# EAGLE board ext_power_M (EAGLE 9.6.2)
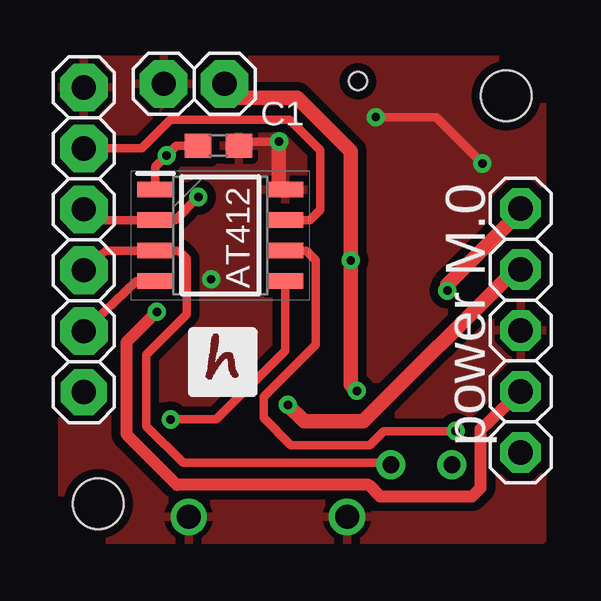
[diagram p0: board, top side]
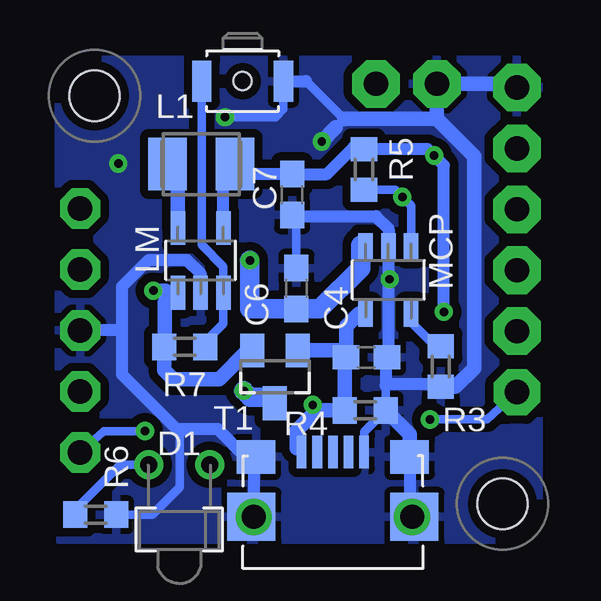
[diagram p1: board, bottom side, seen from below]

No outline drawn. Coordinates in mm, seen from the top.
Copper layers (1*16): Top 0.035mm / dielectric 1.5mm / Bottom 0.035mm
Design rules "default *": minimum track width 14mil, minimum drill 0.35mm, track to track 14mil, track to pad 6mil, pad to pad 6mil, via to via 14mil, smd to smd 14mil, copper to edge 15mil, drill to drill 15mil, minimum pad ring 10mil, minimum via ring 8mil, stop-mask expansion 4mil, vias tented up to drill 0mil, thermal gap 10mil
Holes 2.1 mm at 2,2 19,19

## Footprints (pad centres in the part's own frame; a part is rotated, then mirrored left to right if it is on the bottom)
SOIC127P600X175-8N = smd 1.5 x 0.65: 1 -2.7,1.905; 2 -2.7,0.635; 3 -2.7,-0.635; 4 -2.7,-1.905; 5 2.7,-1.905; 6 2.7,-0.635; 7 2.7,0.635; 8 2.7,1.905
C0603 = smd 1.1 x 1: 1 -0.85,0; 2 0.85,0
LED1.8 = drill 0.7: A -1.27,-0.4; K 1.27,-0.4
1X06 = drill 1.016 pad 1.93 octagon: 1 -6.35,0 | drill 1.016 pad 1.981 octagon: 2 -3.81,0; 3 -1.27,0; 4 1.27,0; 5 3.81,0; 6 6.35,0
1X05 = drill 1.016 pad 1.676 octagon: 1 -5.08,0; 2 -2.54,0; 3 0,0; 4 2.54,0; 5 5.08,0
L3230M = smd 1.6 x 2.2: 1 -1.4,0; 2 1.4,0
1X02 = drill 1.016 pad 1.981 octagon: 1 -1.27,0; 2 1.27,0
SOT32-5 = smd 0.6 x 1.4: BP 0.95,1.35; GND 0,-1.35; SHDN 0.95,-1.35; VIN -0.95,-1.35; VOUT -0.95,1.35
SOT23-5 = smd 0.6 x 1.1: 1 -0.95,-1.45; 2 0,-1.45; 3 0.95,-1.45; 4 0.95,1.35; 5 -0.95,1.35
R0603 = smd 1 x 1.1: 1 -0.85,0; 2 0.85,0
BUTTON-B3U = smd 0.8 x 1.7: P$1 -1.7,0; P$2 1.7,0 | hole 0.75: 0,0
SOT23 = smd 1 x 1.4: D 0,1.1; G -0.95,-1.1; S 0.95,-1.1
MICRO-USB = smd 0.4 x 1.35: D+ 0,2.5; D- -0.65,2.5; GND 1.3,2.5; NC 0.65,2.5; VUSB -1.3,2.5 | smd 2 x 2: GND1 -3.4,-0.2; GND2 3.4,-0.2 | smd 1.6 x 1.4: GND3 -3.202,2.3; GND4 3.2,2.3 | drill 1: P$1 -3.3,-0.2; P$2 3.3,-0.2

## Placement (x,y rotation side)
AT412  AT412  [SOIC127P600X175-8N]  7.09,13.18 0 top
C1  100n  [C0603]  7.01,16.92 0 top
C4  4u7  [C0603]  7.67,8.1 180 bottom
C6  4u7  [C0603]  10.59,10.97 270 bottom
C7  10u  [C0603]  10.77,14.88 90 bottom
D1  LED1.8  [LED1.8]  15.47,3.23 180 bottom
JP2  [1X06]  1.4,13 90 top
JP3  [1X05]  19.6,9.22 270 top
L1  2u2  [L3230M]  14.55,16.15 0 bottom
LIPOL  [1X02]  6,19.5 0 top
LM  TC  [SOT32-5]  14.58,12.14 0 bottom
MCP  MCP  [SOT23-5]  6.76,11.28 180 bottom
R3  22k  [R0603]  4.57,7.72 90 bottom
R4  100k  [R0603]  7.72,5.89 180 bottom
R5  100k  [R0603]  7.77,15.93 270 bottom
R6  2k2  [R0603]  18.95,1.55 180 bottom
R7  100k  [R0603]  15.24,8.53 0 bottom
RESET  BYTTON-B3U  [BUTTON-B3U]  12.83,19.61 0 bottom
T1  FDV  [SOT23]  11.48,7.29 180 bottom
USB  MICRO-USB  [MICRO-USB]  9.07,1.65 0 bottom

## Library data of the parts
AT412 = ATTINY412-SSN; DESCRIPTION: 8-bit Microcontrollers - MCU 20MHz, 4KB, SOIC8, Ind 105C, Green, Tube; HEIGHT: 1.75mm; MANUFACTURER_NAME: Microchip; MANUFACTURER_PART_NUMBER: ATTINY412-SSN; MOUSER_PART_NUMBER: 579-ATTINY412-SSN; MOUSER_PRICE-STOCK: https://www.mouser.co.uk/ProductDetail/Microchip-Technology/ATTINY412-SSN?qs=3HJ2avRr9PItQG9ZsCamPQ%3D%3D
C1 C4 C6 C7 = rcl; SPICEPREFIX: C
D1 LM MCP RESET T1 = !stavebnice03
JP2 JP3 LIPOL = pinhead2
L1 = rcl; SPICEPREFIX: L
R3-R7 = rcl; SPICEPREFIX: R
USB = hugo

## Nets
GND: AT412.8 C1.2 C4.1 C6.1 C7.1 JP2.6 JP3.3 LIPOL.1 LM.GND MCP.2 R3.1 R4.1 R6.1 RESET.P$2 USB.GND USB.GND1 USB.GND2 USB.GND3 USB.GND4 USB.P$1 USB.P$2
N$2: L1.1 LM.VOUT
N$8: C6.2 LIPOL.2 MCP.3 T1.D
N$9: C4.2 JP3.2 MCP.4 R4.2 T1.G USB.VUSB
N$11: MCP.5 R3.2
N$12: JP3.1 LM.VIN R7.1 T1.S
N$15: D1.K R6.2
N$20: LM.SHDN R7.2 RESET.P$1
PA3: AT412.7 JP2.5
PA6: AT412.2 JP2.4 MCP.1 R5.2
PA7: AT412.3 D1.A JP2.3
SCL: AT412.5 JP2.1
SDA: AT412.4 JP2.2
UPDI: AT412.6 JP3.5
VDD: AT412.1 C1.1 C7.2 JP3.4 L1.2 LM.BP R5.1

## Tracks (layer width: path | path; a pad name or v marks a point on that pad's centre or on a via)
GND  (via drill 0.35)
  Top 0.356: 8.06,16.92 C1.2 8.04,17.09 v9.53,17.09 | v13.56,18.11 16.08,18.11 v18.01,16.18
  Top 0.61: AT412.8 9.53,15.34 v9.53,17.09
  Bottom 0.356: USB.GND 7.77,5 R4.1 6.87,6.93 | R6.1 16.59,1.55 15.44,2.69 15.44,4.98 15.44,5 15.54,5.11 | C7.1 10.59,13.86 C6.1 | 10.18,19.61 8.6,18.03 | RESET.P$2 11.13,18.44 11.46,18.11 v13.56,18.11 | v6.71,11.35 6.71,12.68 MCP.2
  Bottom 0.406: 15.19,12.17 15.15,12.17
  Bottom 0.508: C7.1 10.72,13.99 7.27,13.99 6.75,13.46 6.75,12.74 MCP.2 6.76,8.17 C4.1 | C4.1 6.87,8.05 6.87,6.93 6.81,7 4.7,7 R3.1 4.22,6.87 | 6.87,5.99 R4.1 | C4.1 6.82,8.31 | RESET.P$2 10.18,19.61 | USB.GND3 | USB.P$1 12.37,3.47 11.89,3.94 USB.GND3 | USB.GND4 5.87,1.65 USB.GND2 | USB.GND3 12.69,3.94 13.85,5.11 15.54,5.11 | 17.85,9.22 17.85,11.06 16.74,12.17 15.19,12.17 | 15.15,12.17 14.58,11.6 LM.GND | 17.85,9.22 JP3.3 | 15.44,4.98 17.85,7.38 17.85,9.22
  Bottom 0.61: USB.GND4 5.87,4.89 R4.1 | JP2.6 1.56,19.35 1.71,19.5 LIPOL.1 4.73,18.04 | 4.73,18.04 3.18,16.48 3.18,7.66 3.96,6.87 R3.1 | 4.73,18.04 8.59,18.04 8.6,18.03 | 8.95,17.68 v9.53,17.09
  pour Top (isolate 0.356): 0.5,20.5 0.5,0.5 20.5,0.5 20.5,20.5
  pour Bottom (isolate 0.356): 0.5,20.5 20.5,20.5 20.5,0.5 0.5,0.5
N$2
  Bottom 0.61: LM.VOUT 15.53,15.7 15.95,16.13 L1.1
N$8  (via drill 0.35)
  Top 0.61: v12.78,6.71 12.52,6.96 v12.52,12.14 12.52,16.69 10.29,18.92 7.85,18.92 LIPOL.2
  Bottom 0.356: 7.91,12.78 7.86,12.73 MCP.3
  Bottom 0.813: 7.91,12.78 7.91,11.82 9.61,10.12 C6.2 12.52,10.12 v12.52,12.14 | v12.78,6.71 12.51,6.44 11.73,6.44 T1.D
N$9  (via drill 0.35)
  Top 0.61: v9.91,6.12 v9.91,6.11 10.58,5.44 13.05,5.44 19.37,11.76 JP3.2
  Bottom 0.356: MCP.4 7.99,9.93 | 10.57,4.3 10.42,4.15 USB.VUSB
  Bottom 0.61: 7.99,9.93 8.52,9.39 C4.2 | C4.2 8.81,8.39 T1.G | 10.57,4.3 10.57,5.06 9.74,5.89 9.68,5.89 | C4.2 8.57,8.05 R4.2 9.68,5.89 | v9.91,6.12 9.68,5.89
N$11
  Bottom 0.356: MCP.5 5.81,9.57 4.81,8.57 R3.2
N$12  (via drill 0.35)
  Top 0.61: JP3.1 19.5,14.08 16.55,11.13 v16.55,10.88
  Bottom 0.356: 15.66,10.79 LM.VIN 15.61,10.79
  Bottom 0.61: 15.66,10.79 16.07,10.39 16.07,8.56 R7.1 16.09,7.56 15.72,7.19 13.81,7.19 12.61,8.39 T1.S | 15.61,10.79 15.78,10.62 16.04,10.88 v16.55,10.88
N$15
  Bottom 0.356: D1.K 17.93,3.63 19.8,1.75 R6.2
N$20
  Bottom 0.356: RESET.P$1 14.54,19.6 14.54,12.78 13.63,11.87 LM.SHDN 13.63,9.5 14.14,8.99 14.14,8.79 R7.2
PA3
  Top 0.356: 1.52,16.79 JP2.5 3.81,16.81 5.01,18.01 9.99,18.01 11.25,16.74 11.25,14.26 10.81,13.82 AT412.7 | AT412.7 9.52,13.82 | AT412.7 9.81,13.84
PA6  (via drill 0.35)
  Top 0.356: JP2.4 1.95,13.82 AT412.2 5.21,13.82 v6.17,14.78
  Bottom 0.356: 7.53,14.83 R5.2 6.46,15.08 v6.17,14.78 5.81,14.42 MCP.1
PA7
  Top 0.356: JP2.3 2.32,12.55 AT412.3 5.36,12.55 5.69,12.22 5.69,9.89 4.01,8.21 4.01,5.24 5.54,3.7 14.12,3.7 D1.A
SCL  (via drill 0.35)
  Top 0.356: AT412.5 9.79,8.38 6.92,5.51 v5.02,5.51
  Bottom 0.356: v5.02,5.51 2.64,5.51 JP2.1
SDA
  Top 0.356: AT412.4 3.59,11.28 JP2.2
UPDI  (via drill 0.35)
  Top 0.356: AT412.6 10.67,12.55 11.07,12.14 11.07,8.64 8.89,6.45 8.89,5.58 10.03,4.44 13.31,4.44 13.9,5.03 v16.89,5.03
  Bottom 0.356: JP3.5 18.61,5.03 v16.89,5.03
VDD  (via drill 0.35)
  Top 0.356: 4.43,15.09 AT412.1 4.39,16.05 v4.85,16.51 5.26,16.92 C1.1
  Top 0.508: v4.45,9.99 3.17,8.72 3.17,4.9 5.28,2.79 13.26,2.79 13.74,2.31 17.58,2.31 17.93,2.67 17.93,5.11 JP3.4
  Bottom 0.356: 11.12,15.86 11.25,15.73
  Bottom 0.508: LM.BP 13.63,15.73 13.2,16.15 L1.2 13.04,16.15 12.62,15.73 11.25,15.73 C7.2 9.32,15.73 8.18,16.88 7.87,16.88 R5.1 5.12,16.78 v4.85,16.51 4.45,16.1 v4.45,9.99

## Text on the board
tPlace: power M.0